# Altium PCB biolabBoard1.PcbDoc
Units mil, origin at the board's own origin, x right, y up, seen from the top; angles counter-clockwise.
Board outline 6000 x 3990 mil, 2 copper layers (Top Layer, Bottom Layer); 44 components, 44 nets, 204 pads, 6 vias.
Unrouted connection lines stored in the file: 131.
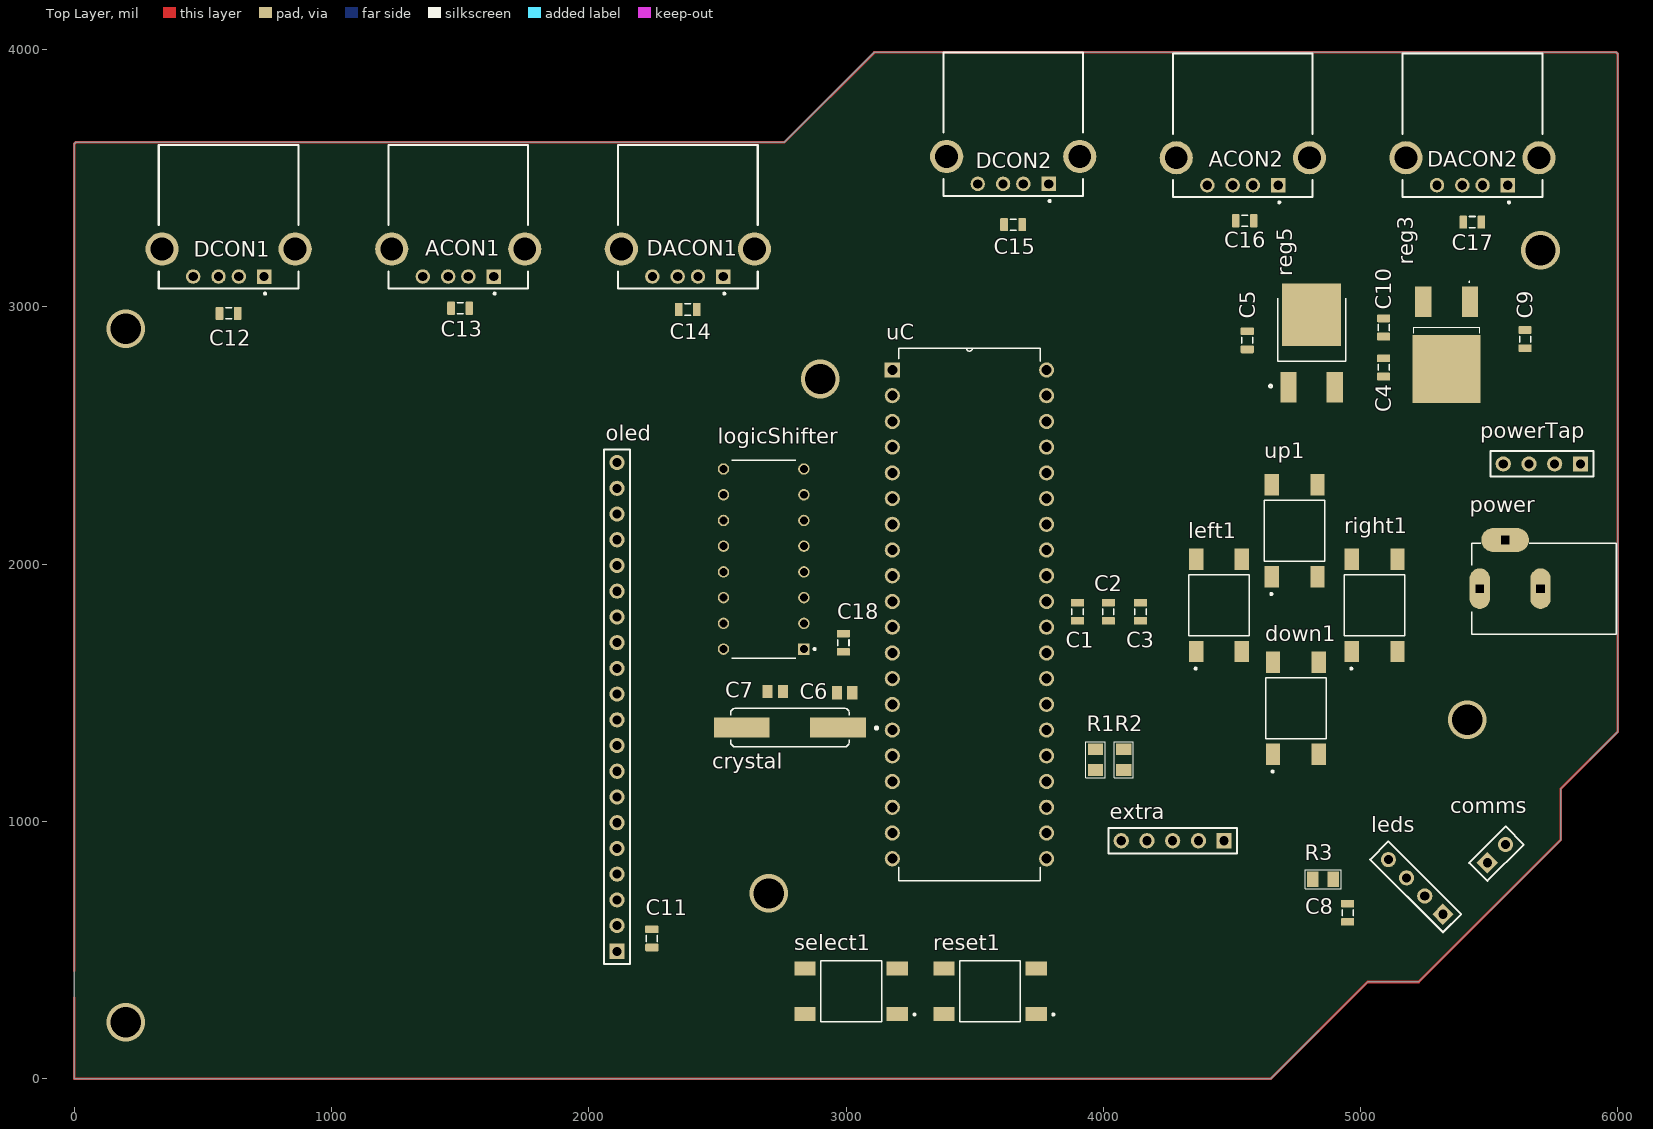
[diagram p0: Top Layer view]
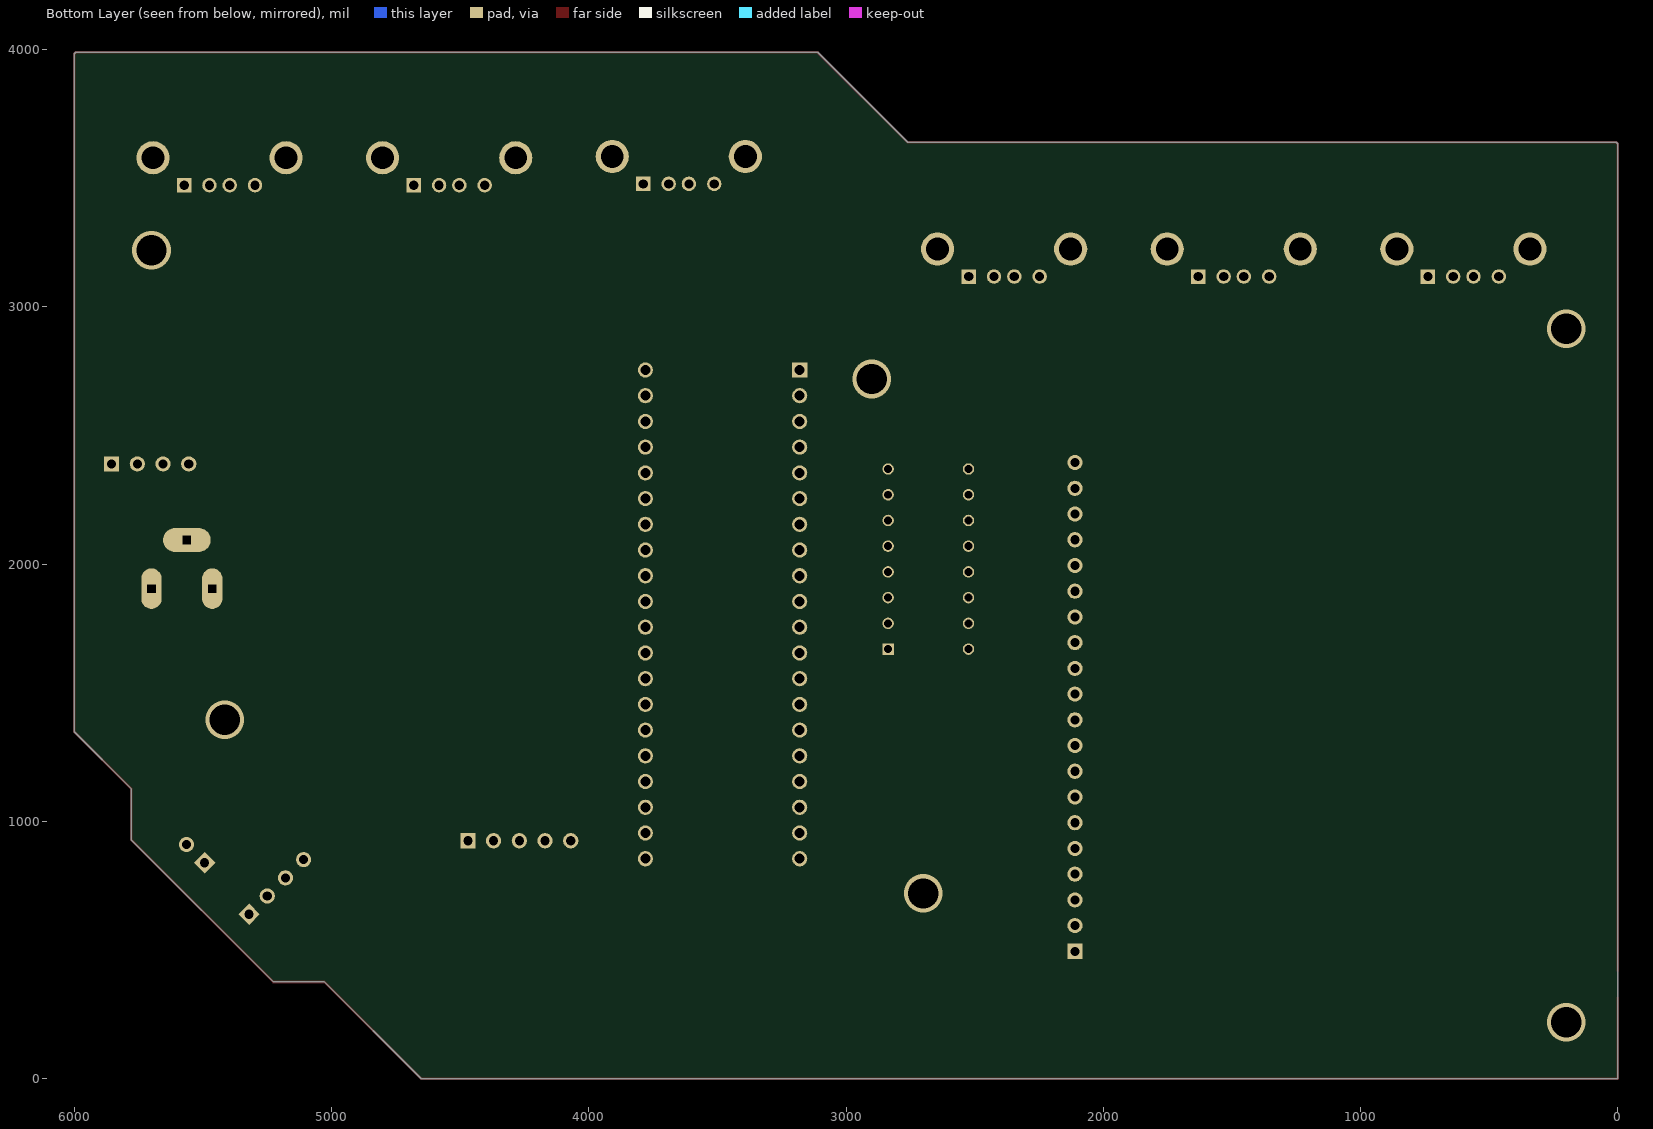
[diagram p1: Bottom Layer view, seen from below]

## Layer stack, top to bottom
Top Solder: solder mask 0.4, Solder Resist, Dk 3.5
Top Layer: signal copper 1.4
Dielectric 1: dielectric 12.6, FR-4, Dk 4.8
Bottom Layer: signal copper 1.4
Bottom Solder: solder mask 0.4, Solder Resist, Dk 3.5

## Board outline
0,315 0,3634.14 5.86,3640 2760,3640 3110,3990 5994.14,3990 6000,3984.14 6000,1348.41 5779.15,1127.55 5779.15,929.15 5225.85,375.85 5027.45,375.85 4651.59,0 0,0

## Design rules (kind name [scope] priority, off if disabled: settings)
Clearance [All] p1: gap=10 ignorepadtopadclearanceinfootprint=FALSE except(0: Arc-Hole Track-Hole SMDPad-Hole THPad-Hole Via-Hole Fill-Hole Poly-Hole Region-Hole Text-Hole)
PolygonConnect [All] p1: connectstyle=Relief reliefconductorwidth=10 reliefentries=4 polygonreliefangle="90 Angle" airgapwidth=10
RoutingVias [All] p1: holewidth=28 width=50 viastyle="Through Hole" minholewidth=28 minwidth=50 maxholewidth=28 maxwidth=50
SolderMaskExpansion [All] p1: expansion=4 istentingtop=FALSE
Width [All] p1: maxlimit=10 minlimit=10 preferedwidth=10
30 further rules are at their usual default settings.

## Components (designator, comment, footprint, x,y, rotation, side; value= is the part's Value field where it differs from the comment)
ACON1 "USB1130-15-A_REVA" GCT_USB1130-15-A_REVA 1492.63,3225 r180 top
ACON2 "USB1130-15-A_REVA" GCT_USB1130-15-A_REVA 4542.63,3580 r180 top
C1 "Capacitor 4.7µF +/-40% 25V 0805" CAPC0805(2012)145_L 3900,1815 r270 top value=100nF
C2 "Capacitor 4.7µF +/-40% 25V 0805" CAPC0805(2012)145_L 4020,1815 r270 top value=100nF
C3 "Capacitor 4.7µF +/-40% 25V 0805" CAPC0805(2012)145_L 4145,1815 r270 top value=100nF
C4 "Capacitor 4.7µF +/-40% 25V 0805" CAPC0805(2012)145_L 5090,2765 r90 top value="10 uF"
C5 "Capacitor 4.7µF +/-40% 25V 0805" CAPC0805(2012)145_L 4560,2870 r270 top value="22 uF"
C6 "Capacitor 1 uF +/- 10% 50 V 0805" CAPC2013X135X45ML10T25 2995,1500 r0 top value=20pF
C7 "Capacitor 1 uF +/- 10% 50 V 0805" CAPC2013X135X45ML10T25 2725,1505 r180 top value=20pF
C8 "Capacitor 4.7µF +/-40% 25V 0805" CAPC0805(2012)145_L 4950,645 r90 top value=100nF
C9 "Capacitor 4.7µF +/-40% 25V 0805" CAPC0805(2012)145_L 5640,2875 r270 top value="100 nF"
C10 "Capacitor 4.7µF +/-40% 25V 0805" CAPC0805(2012)145_L 5090,2920 r270 top value="2.2 uF"
C11 "Capacitor 4.7µF +/-40% 25V 0805" CAPC0805(2012)145_L 2245,545 r270 top value=220nF
C12 "Capacitor 4.7µF +/-40% 25V 0805" CAPC0805(2012)145_L 600,2975 r0 top value=100nF
C13 "Capacitor 4.7µF +/-40% 25V 0805" CAPC0805(2012)145_L 1500,2995 r0 top value=100nF
C14 "Capacitor 4.7µF +/-40% 25V 0805" CAPC0805(2012)145_L 2385,2990 r0 top value=100nF
C15 "Capacitor 4.7µF +/-40% 25V 0805" CAPC0805(2012)145_L 3650,3320 r0 top value=100nF
C16 "Capacitor 4.7µF +/-40% 25V 0805" CAPC0805(2012)145_L 4550,3335 r0 top value=100nF
C17 "Capacitor 4.7µF +/-40% 25V 0805" CAPC0805(2012)145_L 5435,3330 r0 top value=100nF
C18 "Capacitor 4.7µF +/-40% 25V 0805" CAPC0805(2012)145_L 2990,1695 r90 top value=100nF
comms "Header 2" HDR1X2 5493.28,839.29 r45 top
crystal "FOXSDLF/160-20" XTAL_FOXSDLF/160-20 2782.01,1365 r180 top
DACON1 "USB1130-15-A_REVA" GCT_USB1130-15-A_REVA 2385.25,3225 r180 top
DACON2 "USB1130-15-A_REVA" GCT_USB1130-15-A_REVA 5435.25,3580 r180 top
DCON1 "USB1130-15-A_REVA" GCT_USB1130-15-A_REVA 600,3225 r180 top
DCON2 "USB1130-15-A_REVA" GCT_USB1130-15-A_REVA 3650,3585 r180 top
down1 "4-1437565-2" SW_4-1437565-2 4749,1440 r90 top
extra "Header 5" HDR1X5 4470,925 r180 top
leds "Header 4" HDR1X4 5320.71,639.29 r135 top
left1 "4-1437565-2" SW_4-1437565-2 4450,1840 r90 top
logicShifter "CD4050BE" DIP794W45P254L1969H508Q16 2680,2020 r180 top
oled "Header 20" HDR1X20 2110,495 r90 top
power "DC-005" NINIGI_DC-005 5562.2,1905 r180 top
powerTap "Header 4" HDR1X4 5855,2390 r180 top
R1 "R_0805_4.7K_1%" 0805_Resistor 3970,1240 r270 top value=4.7K
R2 "R_0805_4.7K_1%" 0805_Resistor 4080,1240 r270 top value=4.7K
R3 "R_0805_4.7K_1%" 0805_Resistor 4855,775 r0 top value=220
reg3 "LF33CDT-TRY" LD1117DT33 5335,2890 r90 top
reg5 "NCP1117DT33" VREG_NCP1117DT33 4810,2847.95 r0 top
reset1 "4-1437565-2" SW_4-1437565-2 3560,340 r180 top
right1 "4-1437565-2" SW_4-1437565-2 5055,1840 r90 top
select1 "4-1437565-2" SW_4-1437565-2 3020,340 r180 top
uC "ATMEGA644PV-10PU" DIP254P1524X483-40 3780,855 r0 top
up1 "4-1437565-2" SW_4-1437565-2 4744,2130 r90 top

## Footprints (in the part's own frame and the unit in brackets; to place one, negate y for a bottom-side part, rotate by r counter-clockwise, add the part's x,y. Pads: shape width x height; smd on the part's side, far side on the other; paste and mask are expansions set on the pad)
0805_Resistor [mil] "0805 Resistor"
  rect 45x60 smd: 1(-40,0) 2(40,0)
  silkscreen extent -70,-37 70,37, body extent -39,-25 39,25, height 31
CAPC0805(2012)145_L [mm] "Chip Capacitor, Body 2.0x1.2mm, Height 1.45mm, IPC High Density"
  rrect25% 0.76x1.3 smd: 1(-0.9,0) 2(0.89,0)
  silkscreen extent -0.3,-0.55 0.3,0.55, body extent -1,-0.6 1,0.6, height 1.45
CAPC2013X135X45ML10T25 [mm] "Chip Capacitor, 2-Leads, Body 2.10x1.35mm, IPC Low Density"
  rect 1x1.3 smd: 1(-0.75,0) 2(0.75,0)
  body extent -1.05,-0.67 1.05,0.67, height 1.35
DIP254P1524X483-40 [mil]
  rect 59x59 hole 39: 1(-600,1900)
  round 59 hole 39: 2(-600,1800) 3(-600,1700) 4(-600,1600) 5(-600,1500) 6(-600,1400) 7(-600,1300) 8(-600,1200) 9(-600,1100) 10(-600,1000) 11(-600,900) 12(-600,800) 13(-600,700) 14(-600,600) 15(-600,500) 16(-600,400) 17(-600,300) 18(-600,200) 19(-600,100) 20(-600,0) 21(0,0) 22(0,100) 23(0,200) 24(0,300) 25(0,400) 26(0,500) 27(0,600) 28(0,700) 29(0,800) 30(0,900) 31(0,1000) 32(0,1100) 33(0,1200) 34(0,1300) 35(0,1400) 36(0,1500) 37(0,1600) 38(0,1700) 39(0,1800) 40(0,1900)
  silkscreen extent -575,-85 -25,1985, body extent -620,-85 20,1985
DIP794W45P254L1969H508Q16 [mm]
  rect 1.13x1.13 hole 0.78: 1(-3.97,8.89)
  round 1.13 hole 0.78: 2(-3.97,6.35) 3(-3.97,3.81) 4(-3.97,1.27) 5(-3.97,-1.27) 6(-3.97,-3.81) 7(-3.97,-6.35) 8(-3.97,-8.89) 9(3.97,-8.89) 10(3.97,-6.35) 11(3.97,-3.81) 12(3.97,-1.27) 13(3.97,1.27) 14(3.97,3.81) 15(3.97,6.35) 16(3.97,8.89)
  silkscreen extent -5.13,-9.77 3.18,9.77, body extent -3.17,-9.65 3.17,9.65
GCT_USB1130-15-A_REVA [mm]
  rect 1.428x1.428 hole 0.92: 1(-3.5,2.71)
  round 1.428 hole 0.92: 2(-1,2.71) 3(1,2.71) 4(3.5,2.71)
  round 3.276 hole 2.26: S1(-6.57,0) S2(6.57,0)
  silkscreen extent -6.9,-10.28 6.9,4.5, body extent -7.8,-10.28 7.8,3.88, height 6.99
HDR1X2 [mm] "Connector; Header; 2 Position"
  rect 1.5x1.5 hole 0.9: 1(0,0)
  round 1.5 hole 0.9: 2(2.54,0)
  silkscreen extent -1.27,-1.27 3.81,1.27
HDR1X4 [mm] "Connector; Header; 4 Position"
  rect 1.5x1.5 hole 0.9: 1(0,0)
  round 1.5 hole 0.9: 2(2.54,0) 3(5.08,0) 4(7.62,0)
  silkscreen extent -1.27,-1.27 8.89,1.27
HDR1X5 [mm] "Connector; Header; 5 Position"
  rect 1.5x1.5 hole 0.9: 1(0,0)
  round 1.5 hole 0.9: 2(2.54,0) 3(5.08,0) 4(7.62,0) 5(10.16,0)
  silkscreen extent -1.27,-1.27 11.43,1.27
HDR1X20 [mm] "Connector; Header; 20 Position"
  rect 1.5x1.5 hole 0.9: 1(0,0)
  round 1.5 hole 0.9: 2(2.54,0) 3(5.08,0) 4(7.62,0) 5(10.16,0) 6(12.7,0) 7(15.24,0) 8(17.78,0) 9(20.32,0) 10(22.86,0) 11(25.4,0) 12(27.94,0) 13(30.48,0) 14(33.02,0) 15(35.56,0) 16(38.1,0) 17(40.64,0) 18(43.18,0) 19(45.72,0) 20(48.26,0)
  silkscreen extent -1.27,-1.27 49.53,1.27
LD1117DT33 [mm]
  rect 3x1.6 smd: 1(3.325,-2.3) 2(3.325,2.3)
  rect 6.7x6.7 smd: 3(-3.325,0)
  silkscreen extent 0.18,-3.25 5.32,3.25, body extent -3.27,-5.6 3.27,4.27, height 2.4
NINIGI_DC-005 [mm]
  oval 4.7x2.35 hole 0.8 square: 2(0,-4.8)
  oval 2x4 hole 0.8 square: 3(-3.5,0) 4(2.5,0)
  silkscreen extent -11,-4.5 3.3,4.5, body extent -11.06,-4.56 3.36,4.56
SW_4-1437565-2 [mm]
  rect 2.1x1.4 smd: 1(-4.55,2.25) 2(4.55,2.25) 3(-4.55,-2.25) 4(4.55,-2.25)
  silkscreen extent -6.35,-3 3,3
VREG_NCP1117DT33 [mm]
  rect 1.6x3 smd: 1(-2.285,-4.08) 3(2.285,-4.08)
  rect 5.8x6.2 smd: 4(0,3.1)
  silkscreen extent -4.19,-4.09 3.36,4.72, body extent -4.95,-3.25 4.95,3.25, height 2.39
XTAL_FOXSDLF/160-20 [mm]
  rect 5.5x2 smd: 1(-4.75,0) 2(4.75,0)
  silkscreen extent -8.6,-1.9 5.85,1.9

## Part data
ACON1 ACON2 DACON1 DACON2 DCON1 DCON2 down1 left1 logicShifter reset1 right1 select1 up1: Package=None, Availability=Unavailable, Price=None
  ACON1 ACON2 DACON1 DACON2 DCON1 DCON2: MF="{'manufacturer': u'Global Connector Technology'}", MP=USB1130-15-A_REVA
  down1 left1 reset1 right1 select1 up1: MF="{'manufacturer': u'TE Connectivity'}", MP=4-1437565-2
  logicShifter: MF="{'manufacturer': u'Texas Instruments'}", MP=CD4050BE
C1 C2 C3 C4 C5 C8 C9 C10 C11 C12 C13 C14 C15 C16 C17 C18: library part CMP-001-00080-5, "Chip Capacitor, 4.7µF +/-40%, 25V, 0805, Thickness 1.45 mm", Capacitor Type=Ceramic, Case/Package=0805, Max Operating Temperature=85°C, Min Operating Temperature=-55°C, Tolerance=20%, Voltage Rating=25V, Mounting Technology=SMT, Pins=2
C6 C7: library part CMP-001-00007-7, "Chip Capacitor, 1 uF, +/- 10%, 50 V, 0805 (2012 Metric)", Capacitor Type=Ceramic, Case/Package=0805, Max Operating Temperature=125°C, Min Operating Temperature=-55°C, Tolerance=10%, Voltage Rating=50V, Mounting Technology=SMT, Pins=2
comms: "Header, 2-Pin", LatestRevisionDate=17-Jul-2002, LatestRevisionNote="Re-released for DXP Platform.", Publisher="Altium Limited"
crystal: "Crystal 16MHz 20pF 2-Pin HC-49/SD", Package=None, Availability=Unavailable, MF="{'manufacturer': u'Fox Electronics'}", MP=FOXSDLF/160-20, Price=None
extra: "Header, 5-Pin", LatestRevisionDate=17-Jul-2002, LatestRevisionNote="Re-released for DXP Platform.", Publisher="Altium Limited"
leds powerTap: "Header, 4-Pin", LatestRevisionDate=17-Jul-2002, LatestRevisionNote="Re-released for DXP Platform.", Publisher="Altium Limited"
oled: "Header, 20-Pin", LatestRevisionDate=17-Jul-2002, LatestRevisionNote="Re-released for DXP Platform.", Publisher="Altium Limited"
power: "DC Jack", Package=None, Availability=Unavailable, MF="{'manufacturer': u'Best Inc.'}", MP=DC-005, Price=None
R1 R2 R3: library part CMP-058-000045-1, "RES 4.7K OHM 1/8W 1% 0805 SMD", Manufacturer=Yageo, Manufacturer Part Number=AC0805FR-074K7L, Package=0805_Resistor, Power Rating=0.125W, ComponentLink1Description=DigiKey, ComponentLink1URL=https://www.digikey.com/products/en?keywords=YAG3738TR-ND, Design Item ID=R_0805_4.7K_1%, DigiKey PN=YAG3738TR-ND, Source=resistor.SchLib, SVP Creator="Andrew Wu"
reg3: "<b>Linear Voltage Regulators VLDV Reg Inhibit 0.45V 50uA 500mA</b><p> Source: <a href=\"https://componentsearchengine.com/Datasheets/1/LF33CDT-TRY.pdf\"> Datasheet </a>", Package=None, Availability=Unavailable, MF="{'manufacturer': u'STMicroelectronics'}", MP=LF33CDT-TRY, Price=None
reg5: "1.0 A Positive LDO Linear Voltage Regulator (Fixed and Adjustable) Vout: 3.3 V", Package=None, Availability=Unavailable, MF="{'manufacturer': u'ON Semiconductor'}", MP=NCP1117DT33, Price=None
uC: "8-bit Microcontroller with In-System Programmable  Flash", Package=None, Availability=Unavailable, MF="{'manufacturer': u'Microchip Technology'}", MP=ATMEGA644PV-10PU, Price=None

## Via types
v1: diameter 150, hole 118.11, Top Layer to Bottom Layer, 6 vias

## Nets (pads, with @x,y where several pads share a name; then routed paths per layer and width w, separated by ;. In a path a pad name is that pad's centre, name@x,y a point inside that pad or via, vN(x,y) a via of type N, cw(c..) or ccw(c..) an arc to the next point about the centre after c; other vN are vias at no path point)
+3: C10.1 C11.1 C18.1 logicShifter.1 oled.2 powerTap.4 reg3.2
+5: ACON1.1 ACON2.1 C1.2 C2.2 C3.2 C5.1 C8.1 C12.2 C13.2 C14.2 C15.2 C16.2 C17.2 DACON1.1 DACON2.1 DCON1.1 DCON2.1 leds.1 powerTap.3 R1.1 R2.1 reg5.4 uC.10 uC.30 uC.32
+12: C4.1 C9.1 power.4 powerTap.2 reg3.1 reg5.3
ACON1-A1: ACON1.2 DACON1.3 uC.40
ACON1-A2: ACON1.3 uC.39
ACON2-A1: ACON2.2 uC.38
ACON2-A2: ACON2.3 DACON2.3 uC.37
DACON1-D1: DACON1.2 uC.35
DACON2-D1: DACON2.2 uC.4
DC: logicShifter.3 uC.24
DCON1-D1: DCON1.2 uC.36
DCON1-D2: DCON1.3 uC.34
DCON2-D1: DCON2.2 uC.2
DCON2-D2: DCON2.3 uC.3
dwn: down1.3 down1.4 uC.17
ex1: extra.1 uC.25
ex2: extra.2 uC.26
ex3: extra.3 uC.27
ex4: extra.4 uC.28
ex5: extra.5 uC.29
GND: ACON1.4 ACON2.4 C1.1 C2.1 C3.1 C4.2 C5.2 C6.1 C7.1 C8.2 C9.2 C10.2 C11.2 C12.1 C13.1 C14.1 C15.1 C16.1 C17.1 C18.2 DACON1.4 DACON2.4 DCON1.4 DCON2.4 down1.1 down1.2 leds.2 leds.3 left1.1 left1.2 logicShifter.8 oled.1 oled.20 power.2 power.3 powerTap.1 reg3.3 reg5.1 reset1.1 reset1.2 right1.1 right1.2 select1.1 select1.2 uC.11 uC.31 up1.1 up1.2
LEDSIG: R3.1 uC.33
lft: left1.3 left1.4 uC.18
MISO: uC.7
MOSI: logicShifter.7 uC.6
Netleds_4: leds.4 R3.2
NetlogicShifter_2: logicShifter.2 oled.4
NetlogicShifter_4: logicShifter.4 oled.7
NetlogicShifter_6: logicShifter.6 oled.8
NetlogicShifter_10: logicShifter.10 oled.15
NetlogicShifter_12: logicShifter.12 oled.16
OSC+: C6.2 crystal.1 uC.13
OSC-: C7.2 crystal.2 uC.12
RESET: logicShifter.11 uC.9
rit: right1.3 right1.4 uC.19
rst: reset1.3 reset1.4 uC.21
RX: comms.1 uC.14
SCK: logicShifter.5 uC.8
SCL: R2.2 uC.22
SDA: R1.2 uC.23
sel: select1.3 select1.4 uC.20
SS: logicShifter.9 uC.5
TX: comms.2 uC.15
up: uC.16 up1.3 up1.4
pads on no net: ACON1.S1 ACON1.S2 ACON2.S1 ACON2.S2 DACON1.S1 DACON1.S2 DACON2.S1 DACON2.S2 DCON1.S1 DCON1.S2 DCON2.S1 DCON2.S2 logicShifter.13 logicShifter.14 logicShifter.15 logicShifter.16 oled.3 oled.5 oled.6 oled.9 oled.10 oled.11 oled.12 oled.13 oled.14 oled.17 oled.18 oled.19 uC.1
copper on no net: | length 18989.5
  Top Layer w10: 0,315 0,0 4651.59,0 5027.45,375.85 5225.85,375.85 5779.15,929.15 5779.15,1127.55 6000,1348.41 6000,3984.14 5994.14,3990 3110,3990 2760,3640 5.86,3640 0,3634.14 0,1750 0,420
  other v1: 200,220 2700,720 5415,1395 2900,2720 200,2915 5700,3220

## Text inside footprints (layer, text, board x,y; h text height)
ACON1: Mechanical 13 "PCB EDGE" at 1199.32,3618.7 h32 r180
ACON2: Mechanical 13 "PCB EDGE" at 4249.32,3973.7 h32 r180
DACON1: Mechanical 13 "PCB EDGE" at 2091.95,3618.7 h32 r180
DACON2: Mechanical 13 "PCB EDGE" at 5141.95,3973.7 h32 r180
DCON1: Mechanical 13 "PCB EDGE" at 306.69,3618.7 h32 r180
DCON2: Mechanical 13 "PCB EDGE" at 3356.69,3978.7 h32 r180